# Altium PCB PCB1.PcbDoc
Units mm, origin at the board's own origin, x right, y up, seen from the top; angles counter-clockwise.
Board outline 12.57 x 10.41 mm, 2 copper layers (Top Layer, Bottom Layer); 7 components, 5 nets, 23 pads, 8 vias.
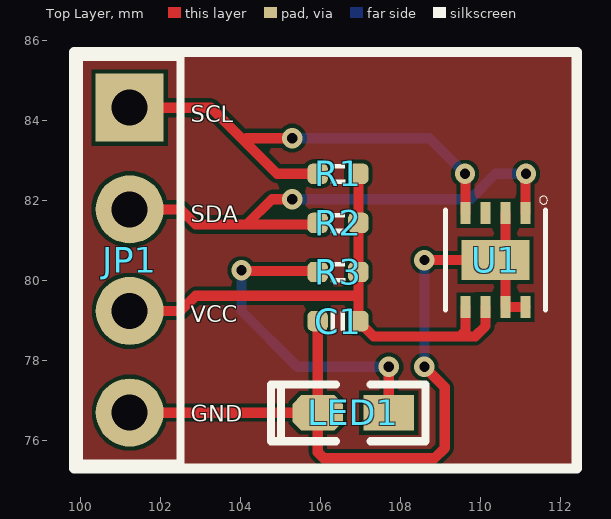
[diagram p0: Top Layer view]
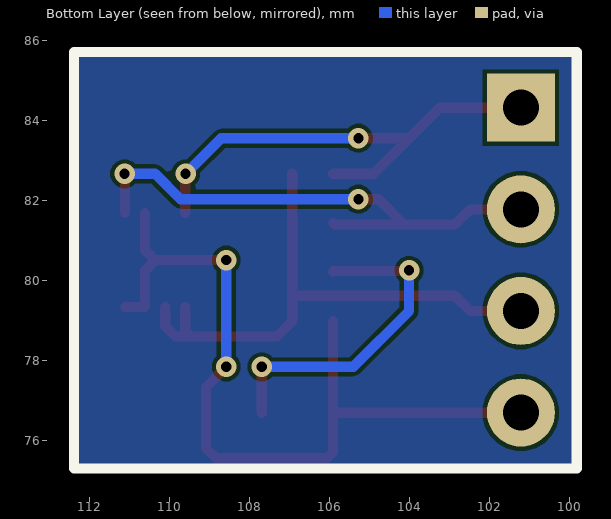
[diagram p1: Bottom Layer view, seen from below]

## Layer stack, top to bottom
Top Solder: solder mask 0.0102, Solder Resist, Dk 3.5
Top Layer: signal copper 0.0356
Dielectric 1: dielectric 0.32, FR-4, Dk 4.8
Bottom Layer: signal copper 0.0356
Bottom Solder: solder mask 0.0102, Solder Resist, Dk 3.5

## Board outline
99.822,75.311 99.822,85.725 112.395,85.725 112.395,75.311

## Design rules (kind name [scope] priority, off if disabled: settings)
Clearance [All] p1: gap=0.102 ignorepadtopadclearanceinfootprint=FALSE except(0: Arc-Hole Track-Hole SMDPad-Hole THPad-Hole Via-Hole Fill-Hole Poly-Hole Region-Hole Text-Hole; 0.064: SMDPad-Via)
ComponentClearance [All] p1: gap=0 collisioncheckmode=3 verticalgap=0 showdistances=FALSE
DiffPairsRouting [All] p1: maxlimit=0.102 minlimit=0.102 mostfreqgap=0.102 toplayer_minwidth=0.102 toplayer_maxwidth=0.102 toplayer_prefwidth=0.102 bottomlayer_minwidth=0.102 bottomlayer_maxwidth=0.102 bottomlayer_prefwidth=0.102 maxuncoupledlength=12.7
FanoutControl Fanout_BGA [All] p1: bgadir=Out bgaviamode=Centered fanoutstyle=Auto fanoutdirection=Alternating viagrid=0.025 // Fanout_BGA (Default Rule)
HoleSize [All] p1: absolutevalues=TRUE maxlimit=254 minlimit=0.089 maxpercent=80.000 minpercent=20.000
MatchedLengths MatchedLengths_DIFF [InDifferentialPairClass('All Differential Pairs')] p1: tolerance=0.127 checknetsindiffpair=TRUE checkdiffpairvsdiffpair=FALSE checkxsignals=FALSE checkothers=FALSE
MatchedLengths MatchedLengths_DQS1 [InDifferentialPair('SDQS1')] p2: tolerance=0.127 checknetsindiffpair=TRUE checkdiffpairvsdiffpair=FALSE checkxsignals=FALSE checkothers=FALSE
MatchedLengths MatchedLengths_DQS0 [InDifferentialPair('SDQS0')] p3: tolerance=0.127 checknetsindiffpair=TRUE checkdiffpairvsdiffpair=FALSE checkxsignals=FALSE checkothers=FALSE
MatchedLengths MatchedLengths_SCK_CS [InNetClass('DDR_SCK_CS')] p4: tolerance=7.62 checknetsindiffpair=FALSE checkdiffpairvsdiffpair=TRUE checkxsignals=TRUE checkothers=TRUE
MatchedLengths MatchedLengths_SCK_DQS [InNetClass('DDR_SCK_DQS')] p5: tolerance=15.24 checknetsindiffpair=FALSE checkdiffpairvsdiffpair=TRUE checkxsignals=TRUE checkothers=TRUE
MatchedLengths MatchedLengths_CMD [InNetClass('DDR_CMD')] p6: tolerance=12.7 checknetsindiffpair=FALSE checkdiffpairvsdiffpair=TRUE checkxsignals=TRUE checkothers=TRUE
MatchedLengths MatchedLengths_DATAH [InNetClass('DDR_DATAH')] p7: tolerance=6.35 checknetsindiffpair=FALSE checkdiffpairvsdiffpair=TRUE checkxsignals=TRUE checkothers=TRUE
MatchedLengths MatchedLengths_DATAL [InNetClass('DDR_DATAL')] p8: tolerance=6.35 checknetsindiffpair=FALSE checkdiffpairvsdiffpair=TRUE checkxsignals=TRUE checkothers=TRUE
MatchedLengths MatchedLengths_SCK [InDifferentialPair('SCK')] p9: tolerance=0.127 checknetsindiffpair=TRUE checkdiffpairvsdiffpair=FALSE checkxsignals=FALSE checkothers=FALSE
MinimumSolderMaskSliver [All] p1 off: minsoldermaskwidth=0.051
PlaneClearance [All] p1: clearance=0.203
PlaneConnect [All] p1: planeconnectstyle=Direct reliefexpansion=0.508 reliefentries=4 reliefconductorwidth=0.254 reliefairgap=0.254
PolygonConnect PolygonConnect_VDD-5V [All vs IsNamedPolygon('VDD-5V_L01_P009')] p1: thpad.connectstyle=Direct thpad.reliefconductorwidth=0.254 thpad.reliefentries=4 thpad.polygonreliefangle="90 Angle" thpad.airgapwidth=0.254 smdpad.connectstyle=Relief smdpad.reliefconductorwidth=0.254 smdpad.reliefentries=4 smdpad.polygonreliefangle="90 Angle" smdpad.airgapwidth=0.254 via.connectstyle=Direct via.reliefconductorwidth=0.254 via.reliefentries=4 via.polygonreliefangle="90 Angle" via.airgapwidth=0.254
PolygonConnect [All] p2: connectstyle=Direct reliefconductorwidth=0.254 reliefentries=4 polygonreliefangle="90 Angle" airgapwidth=0.254
RoutingVias [All] p1: holewidth=0.203 width=0.406 viastyle="Through Hole" minholewidth=0.152 minwidth=0.305 maxholewidth=0.711 maxwidth=1.27
SilkToSilkClearance [All] p1: silktosilkclearance=0
SilkToSolderMaskClearance [IsPad] p1: minsilkscreentomaskgap=0 clearancetoexposedcopper=TRUE
SolderMaskExpansion [All] p1: expansion=0.076 istentingtop=FALSE
Width GND [(InNet('AGND') OR InNet('GND'))] p1: maxlimit=1.27 minlimit=0.102 preferedwidth=0.254
Width VCC [(InNet('VDD_SYS_3.3V') OR InNet('VDD_AV_3.3V') OR InNet('VDD_5V') OR InNet('VDD1V2-SYS') OR InNet('VDD1V1-EPHY') OR InNet('VDD-CPUX') OR InNet('VDD-CPUS') OR InNet('VDD-CPUFB') OR InNet('VCC-DRAM'))] p2: maxlimit=1.27 minlimit=0.102 preferedwidth=0.254
Width [All] p3: maxlimit=254 minlimit=0.102 preferedwidth=0.102
21 further rules are at their usual default settings.

## Components (designator, comment, footprint, x,y, rotation, side; value= is the part's Value field where it differs from the comment)
C1 "0.1uF" CAP_0402 106.426,78.994 r180 top value=0.1u
JP1 "HDR-1X4" HDR2.54-LI-4P 101.219,80.518 r270 top
LED1 "红色" LED0603_R 106.807,76.708 r180 top
R1 "10K" RES_0402 106.426,82.677 r0 top value=22R
R2 "10K" RES_0402 106.426,81.449 r0 top value=22R
R3 "10K" RES_0402 106.426,80.222 r0 top value=22R
U1 "SHT30-DIS" DFN250X250X100-9N 110.363,80.518 r270 top locked

## Footprints (in the part's own frame and the unit in brackets; to place one, negate y for a bottom-side part, rotate by r counter-clockwise, add the part's x,y. Pads: shape width x height; smd on the part's side, far side on the other; paste and mask are expansions set on the pad)
CAP_0402 [mil]
  rrect50% 20x20 smd: 1(-20,0) 2(20,0)
  silkscreen extent -7,-9 7,9, body extent -20,-10 20,10, height 20
DFN250X250X100-9N [mm]
  rect 0.55x0.25 smd: 1(-1.175,0.75) 2(-1.175,0.25) 3(-1.175,-0.25) 4(-1.175,-0.75) 5(1.175,-0.75) 6(1.175,-0.25) 7(1.175,0.25) 8(1.175,0.75)
  rect 1x1.7 smd: 9(0,0)
  silkscreen extent -1.6,-1.25 1.25,1.3, body extent -1.25,-1.25 1.25,1.25, height 0.9
HDR2.54-LI-4P [mm] "排针，4脚"
  rect 1.7x1.7 hole 0.9: 1(-3.81,0)
  round 1.7 hole 0.9: 2(-1.27,0) 3(1.27,0) 4(3.81,0)
  silkscreen extent -5.08,-1.27 5.08,1.27, body extent -5.08,-1.27 5.08,1.27, height 2.54
LED0603_R [mil] "红色0603LED"
  rect 50x35 smd: 1(-35,0.26)
  oct 50x35 smd: 2(35,0.26)
  silkscreen extent -71,-28 81,28, body extent -32,-16 31,16, height 18
RES_0402 [mil]
  rrect50% 20x20 smd: 1(-20,0) 2(20,0)
  silkscreen extent -6,-10 6,10, body extent -20,-10 20,10, height 14

## Part data
C1: library part 电容-0402, "Capacitor"
JP1: library part "Header 4", "4P接插件", BOM名称=4P接插件, 封装库来自淘宝卖家 ID：黄晶宝石=其他店铺购入均为盗版假冒封装库, 联系卖家，免费查找封装=唯一出售店铺网址https://shop463601444.taobao.com
LED1: library part LED-SMD, "贴片LED", BOM名称=贴片LED, 联系卖家 免费查找封装=封装库来自淘宝卖家ID：黄晶宝石
R1 R2 R3: library part 电阻-0402, "Resistor"
U1: "SHT3x Series 5.5 V 卤3 %RH 0 to 100% Temperature and Humidity Sensor - DFN-8", Package=None, Availability=Unavailable, MF="{'manufacturer': u'Sensirion AG'}", MP=SHT30-DIS, Price=None

## Via types
v1: diameter 0.508, hole 0.254, Top Layer to Bottom Layer, tented both sides, 8 vias

## Nets (pads, with @x,y where several pads share a name; then routed paths per layer and width w, separated by ;. In a path a pad name is that pad's centre, name@x,y a point inside that pad or via, vN(x,y) a via of type N, cw(c..) or ccw(c..) an arc to the next point about the centre after c; other vN are vias at no path point)
GND: C1.2 JP1.4 LED1.2 U1.2 U1.7 U1.8 U1.9 | length 21.1
  Top Layer w0.254: JP1.4 101.222,76.705 105.915,76.705 LED1.2 ; C1.2 LED1.2 ; v1(108.585,77.851) 109.093,77.343 109.093,75.819 108.839,75.565 106.067,75.565 105.918,75.714 LED1.2 ; v1(108.585,80.518) U1.9 ; U1.2 110.613,80.768 U1.9 ; U1.8 U1.7 110.613,80.268 U1.9
  Bottom Layer w0.254: v1(108.585,77.851) v1(108.585,80.518)
NetLED1_1: LED1.1 R3.1 | length 8.3
  Top Layer w0.254: v1(104.013,80.264) 104.034,80.243 105.897,80.243 R3.1 ; LED1.1 v1(107.696,77.851)
  Bottom Layer w0.254: v1(104.013,80.264) 104.013,79.248 105.41,77.851 v1(107.696,77.851)
SCL: JP1.1 R1.1 U1.4 | length 12.3
  Top Layer w0.254: JP1.1 103.251,84.328 104.077,83.502 ; v1(105.283,83.566) 104.14,83.566 104.077,83.502 ; R1.1 104.902,82.677 104.077,83.502 ; v1(109.601,82.677) 109.611,82.667 109.611,81.695 U1.4
  Bottom Layer w0.254: v1(105.283,83.566) 108.712,83.566 v1(109.601,82.677)
SDA: JP1.2 R2.1 U1.1 | length 13.4
  Top Layer w0.254: JP1.2 102.489,81.788 102.87,81.407 104.14,81.407 ; v1(105.283,82.042) 104.775,82.042 104.14,81.407 ; R2.1 105.876,81.407 104.14,81.407 ; U1.1 111.115,81.695 111.115,82.667 v1(111.125,82.677)
  Bottom Layer w0.254: v1(105.283,82.042) 109.728,82.042 110.363,82.677 v1(111.125,82.677)
VCC: C1.1 JP1.3 R1.2 R2.2 R3.2 U1.5 U1.6 | length 14.3
  Top Layer w0.254: JP1.3 102.489,79.248 102.87,79.629 106.913,79.629 106.934,79.608 ; R1.2 R2.2 R3.2 106.934,79.608 ; U1.5 109.611,79.341 109.611,78.75 109.474,78.613 ; U1.6 110.111,79.341 110.111,78.869 109.855,78.613 109.474,78.613 ; 106.934,79.608 C1.1 107.315,78.613 109.474,78.613
pads on no net: U1.3

## Polygon pours and split planes (outlines as drawn)
no net on Top Layer "NONET_L01_P001" (solid, pour order 1): 99.822,85.725 112.395,85.725 112.395,75.311 99.822,75.311
no net on Bottom Layer "NONET_L02_P002" (solid, pour order 2): 99.822,85.725 112.395,85.725 112.395,75.311 99.822,75.311

## Silkscreen, mask and mechanical layers (free items; w line width, h text height)
Top Overlay:
  the board outline again, w0.254
  text "SCL" at 102.743,83.828 h0.7
  text "SDA" at 102.743,81.33 h0.7
  text "VCC" at 102.744,78.832 h0.7
  text "GND" at 102.743,76.335 h0.7
Bottom Overlay:
  the board outline again, w0.254